# Altium PCB RelayDetect.PcbDoc (part 2 of 2)
Units mm, origin at the board's own origin, x right, y up, seen from the top; angles counter-clockwise.
Board outline 83 x 53 mm, 4 copper layers (Top Layer, Signal, GND, Bottom Layer), stack 0.603 mm thick; 164 components, 110 nets, 604 pads, 228 vias.
Unrouted connection lines stored in the file: 62.
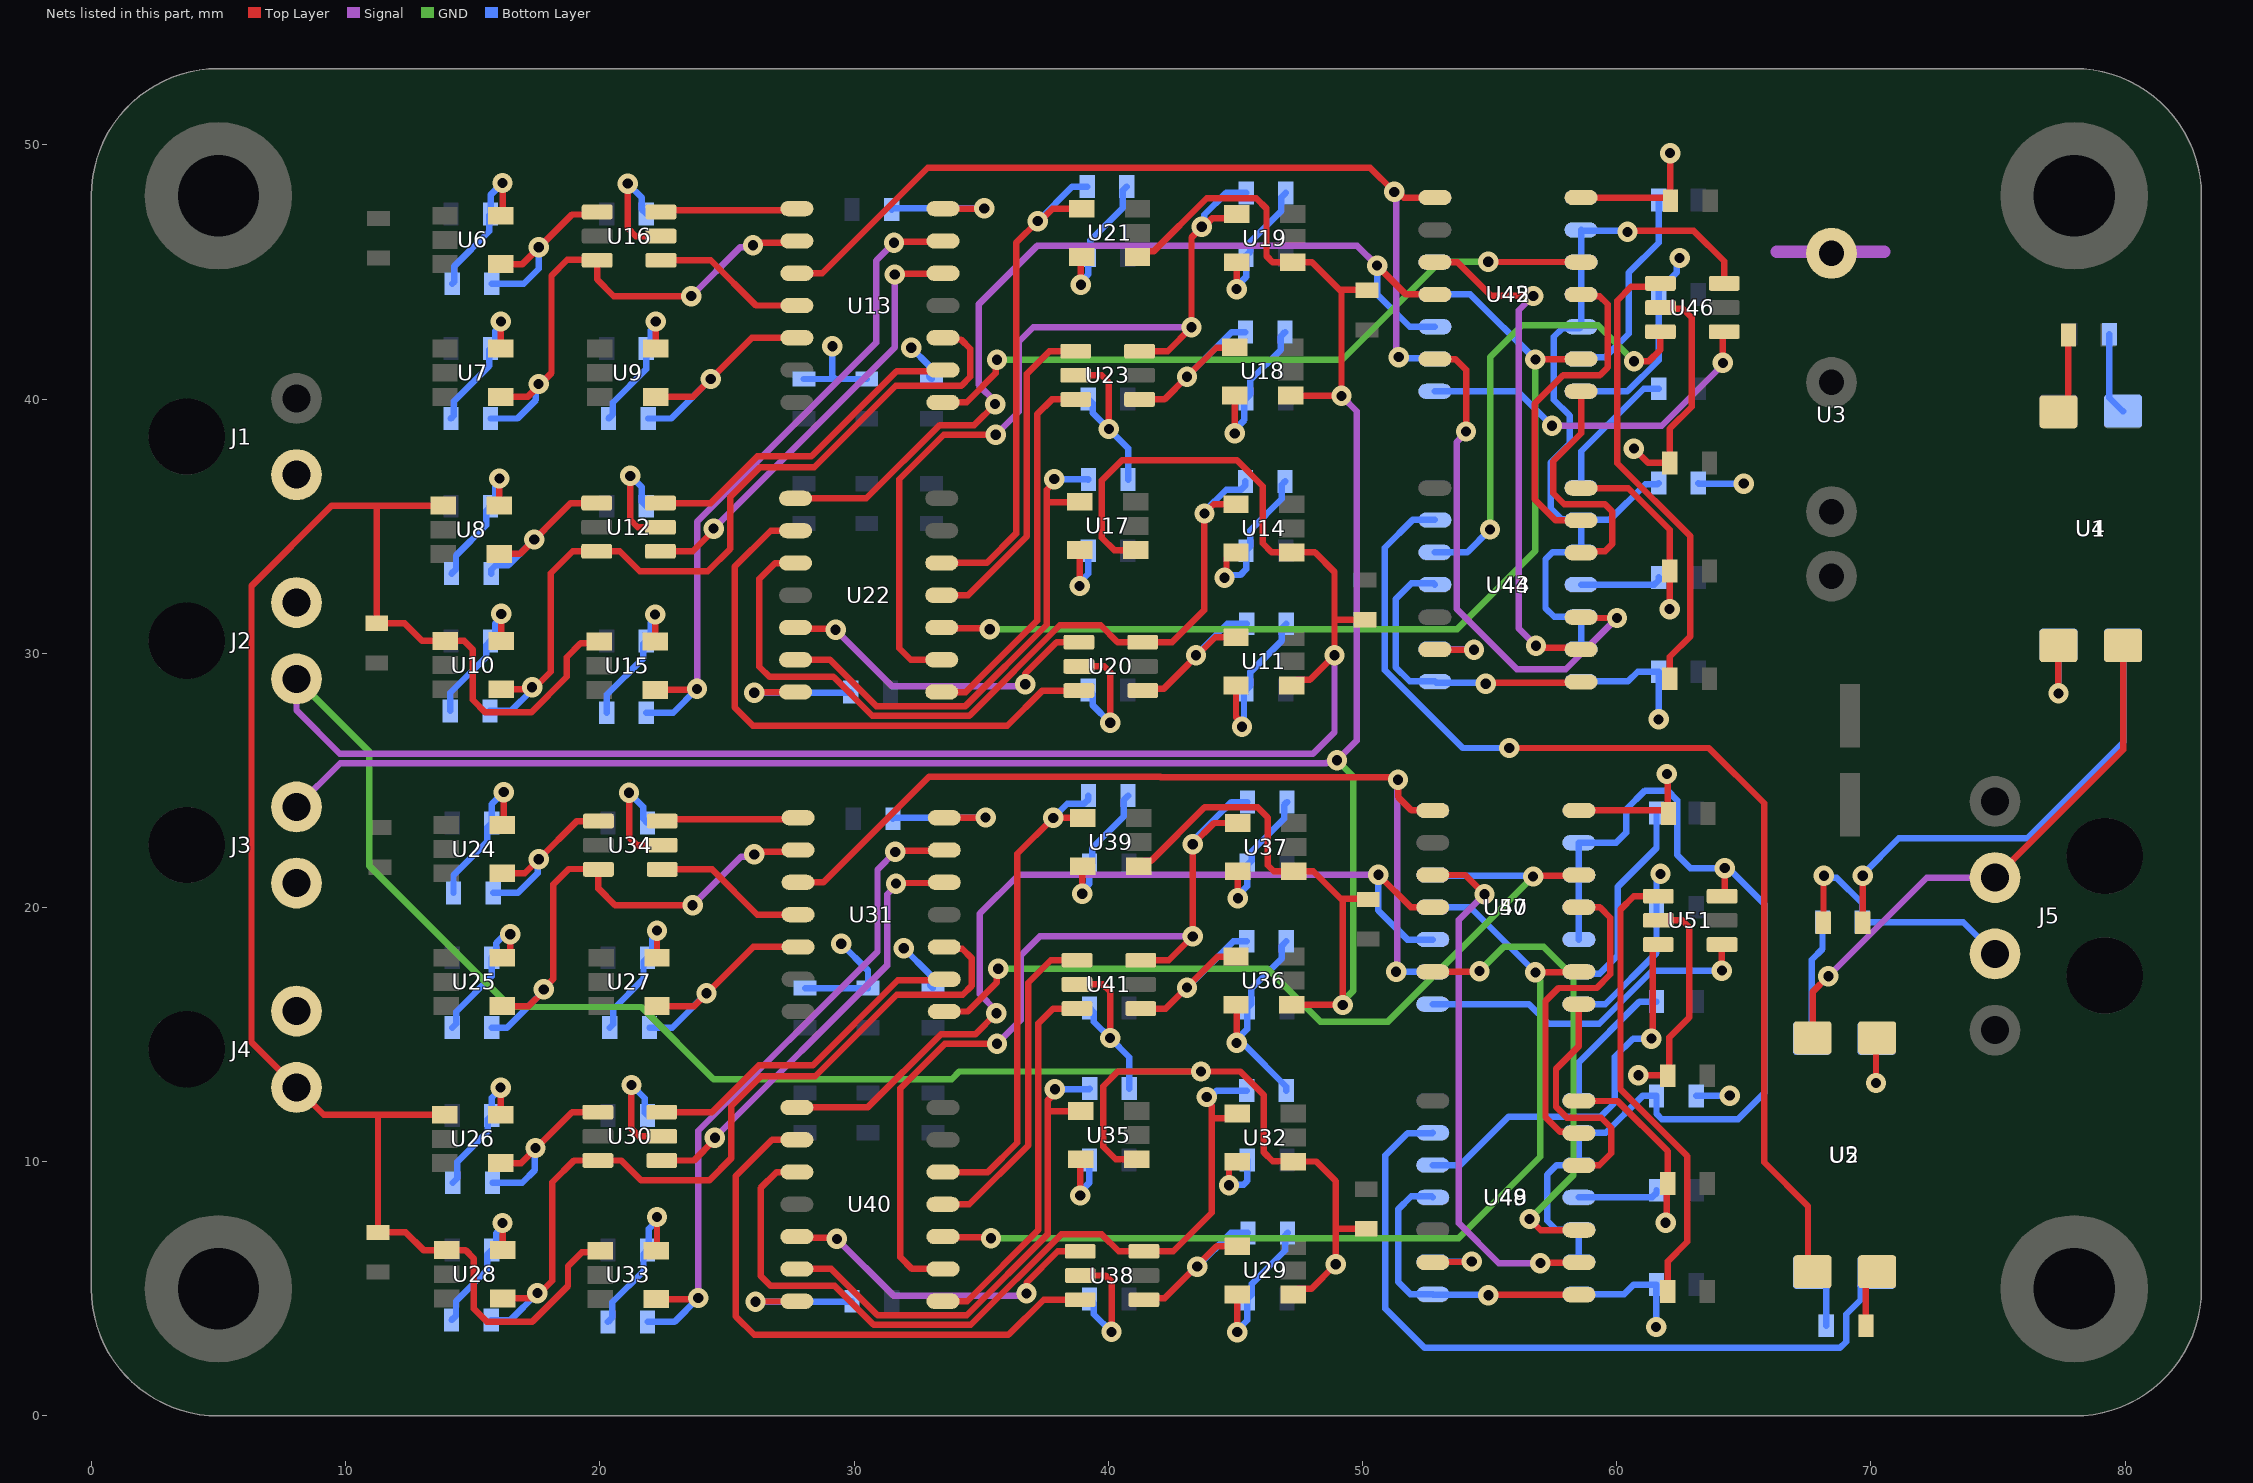
[diagram p4: the nets of this part, all layers, seen from the top]

## Via types
v1: diameter 0.8, hole 0.4, Top Layer to Bottom Layer, tented both sides, 228 vias

## Nets (pads, with @x,y where several pads share a name; then routed paths per layer and width w, separated by ;. In a path a pad name is that pad's centre, name@x,y a point inside that pad or via, vN(x,y) a via of type N, cw(c..) or ccw(c..) an arc to the next point about the centre after c; other vN are vias at no path point) (continued)
In2: J2.2 R15.2 R25.2 U11.1 U14.1 U17.1 U29.1 U32.1 U35.1 | length 137.1
  Top Layer w0.254: U17.1@41.075,34.06 40.24,34.06 39.75,34.55 39.75,36.8 40.55,37.6 45.05,37.6 46.075,36.575 46.075,34.325 46.425,33.975 47.21,33.975 U14.1@47.225,33.96 47.235,33.97 48.13,33.97 48.9,33.2 48.9,31.3 ; U35.1@41.125,10.1 40.29,10.1 39.8,10.59 39.8,12.975 40.375,13.55 45.19,13.55 46.125,12.615 46.125,10.365 46.475,10.015 47.26,10.015 U32.1@47.275,10 47.285,10.01 48.18,10.01 48.95,9.24 48.95,7.34 ; U11.1@47.225,28.735 47.448,28.958 47.933,28.958 v1(48.9,29.925) 48.9,31.3 ; U29.1@47.275,4.775 47.498,4.998 47.983,4.998 v1(48.95,5.965) 48.95,7.34 ; R15.2@50.1,31.32 48.92,31.32 48.9,31.3 ; R25.2@50.15,7.36 48.97,7.36 48.95,7.34
  Signal w0.254: J2.2@8.07,28.992 8.07,27.755 9.771,26.054 48.054,26.054 48.9,26.9 v1(48.9,29.925)
  GND w0.254: J2.2@8.07,28.992 10.925,26.137 10.925,21.65 16.488,16.087 21.638,16.087 24.475,13.25 33.839,13.25 34.139,13.55 v1(43.65,13.55)
In3: J3.2 R16.2 R26.2 U18.1 U19.1 U21.1 U36.1 U37.1 U39.1 | length 104.2
  Top Layer w0.254: U21.1@41.15,45.585 41.373,45.808 41.783,45.808 43.875,47.9 45.825,47.9 46.225,47.5 46.225,45.625 46.465,45.385 U19.1@47.25,45.385 48.015,45.385 49.175,44.225 v1(49.175,40.125) 49.17,40.13 47.18,40.13 U18.1@47.175,40.135 ; U39.1@41.2,21.625 41.423,21.848 41.698,21.848 43.79,23.94 45.875,23.94 46.275,23.54 46.275,21.665 46.515,21.425 U37.1@47.3,21.425 48.065,21.425 49.225,20.265 v1(49.225,16.165) 49.22,16.17 47.23,16.17 U36.1@47.225,16.175 ; 49.102,44.298 R16.2@50.157,44.298 ; 49.152,20.338 R26.2@50.207,20.338
  Signal w0.254: J3.2@8.07,23.958 9.787,25.675 48.578,25.675 48.591,25.688 48.896,25.688 v1(49,25.792) 49.775,26.567 49.775,39.525 v1(49.175,40.125)
  GND w0.254: v1(49,25.792) 49.629,25.163 49.629,16.717 49.225,16.313 v1(49.225,16.165)
In4: J4.2 R14.2 R24.2 U8.1 U10.1 U15.1 U26.1 U28.1 U33.1 | length 70.9
  Top Layer w0.254: U8.1@13.85,35.81 11.143,35.81 ; U26.1@13.9,11.85 11.192,11.85 ; U15.1@19.975,30.46 19.908,30.393 19.243,30.393 18.7,29.85 18.7,29.075 17.3,27.675 15.5,27.675 15,28.175 15,30.15 14.665,30.485 U10.1@13.925,30.485 13.015,30.485 12.32,31.18 R14.2@11.225,31.18 11.225,35.728 11.143,35.81 ; U33.1@20.025,6.5 19.958,6.433 19.293,6.433 18.75,5.89 18.75,5.115 17.35,3.715 15.55,3.715 15.05,4.215 15.05,6.19 14.715,6.525 U28.1@13.975,6.525 13.065,6.525 12.37,7.22 R24.2@11.275,7.22 11.275,11.768 11.192,11.85 ; 11.143,35.81 9.46,35.81 6.3,32.65 6.3,14.695 8.07,12.925 9.145,11.85 11.192,11.85
NetR1_2: R1.2 U1.2 | length 3.2
  Top Layer w0.254: U1.2@77.38,39.5 77.77,39.89 R1.2@77.77,42.525
NetR2_2: R2.2 U2.2 | length 2.3
  Top Layer w0.254: R2.2@69.805,3.55 69.805,5.235 U2.2@70.245,5.675
NetR3_2: R3.2 U4.3 | length 18.1
  Top Layer w0.254: v1(69.675,21.25) 69.677,21.248 69.677,19.402 R3.2@69.68,19.4
  Bottom Layer w0.254: v1(69.675,21.25) 69.675,21.3 71.1,22.725 76.15,22.725 79.92,26.495 U4.3@79.92,30.325
NetR4_2: R4.2 U5.3 | length 4.8
  Bottom Layer w0.254: U5.3@67.68,14.85 67.68,16.468 67.673,16.475 67.673,17.948 68.095,18.37 R4.2@68.095,19.425
NetR5_2: R5.2 U4.2 | length 3.3
  Bottom Layer w0.254: R5.2@79.38,42.55 79.38,40.048 79.903,39.525 U4.2@79.92,39.525
NetR6_2: R6.2 U5.2 | length 2.4
  Bottom Layer w0.254: U5.2@67.68,5.65 67.722,5.65 68.245,5.127 R6.2@68.245,3.55
NetR27_1: R27.1 U43.9 U43.10 U43.12 U43.13 U45.9 U45.10 U45.11 U45.12 U46.3 | length 32
  Top Layer w0.254: v1(60.425,46.575) 60.475,46.625 63.025,46.625 64.23,45.42 U46.3@64.23,44.55
  Bottom Layer w0.254: U43.13@58.6,30.165 U43.12@58.6,31.435 57.54,31.435 57.2,31.775 57.2,33.7 57.475,33.975 U43.10@58.6,33.975 U43.9@58.6,35.245 ; v1(60.425,46.575) 60.385,46.615 58.64,46.615 U45.9@58.6,46.655 U45.10@58.6,45.385 U45.11@58.6,44.115 U45.12@58.6,42.845 58.534,42.779 57.854,42.779 57.525,42.45 57.525,39.975 58.15,39.35 58.15,38.25 57.4,37.5 57.4,35.7 57.825,35.275 58.57,35.275 U43.9@58.6,35.245 ; R27.1@61.65,36.695 61.598,36.643 61.118,36.643 59.72,35.245 U43.9@58.6,35.245
NetR28_2: R28.2 U43.8 | length 5.5
  Bottom Layer w0.254: U43.8@58.6,36.515 58.6,37.946 61.059,40.405 R28.2@61.65,40.405
NetR29_2: R29.2 U43.11 | length 3.2
  Bottom Layer w0.254: U43.11@58.6,32.705 61.477,32.705 61.65,32.878 R29.2@61.65,32.985
NetR30_2: R30.2 U45.13 | length 8
  Bottom Layer w0.254: U45.13@58.6,41.575 58.666,41.641 59.541,41.641 60.475,42.575 60.475,44.975 61.65,46.15 R30.2@61.65,47.825
NetR31_2: R31.2 U46.4 | length 18.4
  Top Layer w0.254: U46.4@61.72,44.55 61.595,44.425 60.575,44.425 60.023,43.873 60.023,37.477 62.9,34.6 62.9,30.675 62.09,29.865 R31.2@62.09,29
NetR32_1: R32.1 U48.9 U48.10 U48.12 U48.13 U50.9 U50.10 U50.11 U50.12 U51.3 | length 40.4
  Top Layer w0.254: U51.3@64.145,20.445 64.25,20.55 v1(64.25,21.55)
  Bottom Layer w0.254: U48.13@58.515,6.06 U48.12@58.515,7.33 57.62,7.33 57.27,7.68 57.27,9.495 57.645,9.87 U48.10@58.515,9.87 U48.9@58.515,11.14 59.565,11.14 61.015,12.59 R32.1@61.565,12.59 61.565,11.885 61.775,11.675 64.775,11.675 65.796,12.696 65.796,20.152 64.398,21.55 62.9,21.55 62.375,22.075 62.375,24.225 62,24.6 61.114,24.6 60.375,23.861 60.375,22.95 59.975,22.55 U50.9@58.515,22.55 U50.10@58.515,21.28 U50.11@58.515,20.01 U50.12@58.515,18.74
NetR33_2: R33.2 U48.8 | length 5.5
  Bottom Layer w0.254: U48.8@58.515,12.41 58.515,13.915 60.9,16.3 R33.2@61.565,16.3
NetR34_2: R34.2 U48.11 | length 3.2
  Bottom Layer w0.254: U48.11@58.515,8.6 61.392,8.6 61.565,8.773 R34.2@61.565,8.88
NetR35_2: R35.2 U50.13 | length 8.1
  Bottom Layer w0.254: U50.13@58.515,17.47 58.581,17.404 59.321,17.404 59.325,17.4 60.05,18.125 60.05,20.825 61.565,22.34 R35.2@61.565,23.72
NetR36_2: R36.2 U51.4 | length 18.1
  Top Layer w0.254: U51.4@61.635,20.445 60.67,20.445 60.15,19.925 60.15,12.85 62.775,10.225 62.775,6.85 62.005,6.08 R36.2@62.005,4.895
NetR37_1: R37.1 U6.4 U16.1 | length 7.6
  Top Layer w0.254: U6.4@16.11,45.31 16.96,45.31 18.911,47.261 19.796,47.261 U16.1@19.895,47.36
  Bottom Layer w0.254: R37.1@15.755,44.535 17.01,44.535 17.6,45.125 v1(17.6,45.975)
NetR38_1: R38.1 U7.4 U13.2 U16.3 | length 20.8
  Top Layer w0.254: U7.4@16.11,40.085 17.16,40.085 18.1,41.025 18.1,44.85 18.725,45.475 19.88,45.475 U16.3@19.895,45.46 19.895,44.705 20.55,44.05 v1(23.6,44.05) ; v1(26.025,46.05) 26.129,46.154 27.684,46.154 U13.2@27.75,46.22
  Signal w0.254: v1(23.6,44.05) 25.514,45.964 25.939,45.964 v1(26.025,46.05)
  Bottom Layer w0.254: R38.1@15.705,39.235 16.76,39.235 17.489,39.964 17.489,40.487 v1(17.594,40.591)
NetR39_1: R39.1 U8.4 U12.1 | length 7
  Top Layer w0.254: U8.4@16.05,33.91 16.86,33.91 18.86,35.91 U12.1@19.875,35.91
  Bottom Layer w0.254: R39.1@15.73,33.135 15.73,33.285 15.903,33.458 16.408,33.458 v1(17.425,34.475)
NetR40_1: R40.1 U9.4 U13.5 | length 9.6
  Top Layer w0.254: U9.4@22.2,40.085 23.66,40.085 25.985,42.41 U13.5@27.75,42.41
  Bottom Layer w0.254: R40.1@21.905,39.235 22.81,39.235 v1(24.367,40.792)
NetR41_1: R41.1 U10.4 U12.3 U13.10 | length 32
  Top Layer w0.254: U10.4@16.125,28.585 v1@17.34,28.585 ; v1@17.403,28.603 18.075,29.275 18.075,33.15 18.935,34.01 20.79,34.01 21.575,33.225 24.25,33.225 25.129,34.104 25.129,35.896 25.125,35.9 25.125,36.139 26.305,37.32 28.43,37.32 31.636,40.525 34.225,40.525 34.575,40.875 34.575,41.975 34.206,42.344 33.566,42.344 U13.10@33.5,42.41
  Bottom Layer w0.254: R41.1@15.68,27.735 16.51,27.735 17.34,28.565 v1(17.34,28.667)
NetR42_1: R42.1 U11.4 U20.1 | length 7
  Top Layer w0.254: U20.1@41.355,28.535 41.419,28.599 42.174,28.599 44.21,30.635 U11.4@45.025,30.635
  Bottom Layer w0.254: v1(43.45,29.925) 44.685,31.16 R42.1@45.445,31.16
NetR43_1: R43.1 U14.4 U20.3 U22.10 | length 33.2
  Top Layer w0.254: U22.10@27.7,33.555 27.695,33.55 26.9,33.55 26.275,32.925 26.275,29.475 26.675,29.075 29.189,29.075 30.72,27.544 34.541,27.544 38.097,31.1 39.7,31.1 40.365,30.435 42.51,30.435 43.775,31.7 v1@43.775,35.502 ; v1(43.786,35.502) 44.144,35.86 U14.4@45.025,35.86
  Bottom Layer w0.254: v1(43.786,35.502) 43.786,35.586 44.637,36.437 45.222,36.437 45.395,36.61 R43.1@45.395,36.76
NetR44_1: R44.1 U13.13 U15.4 | length 26.8
  Top Layer w0.254: U15.4@22.175,28.56 23.785,28.56 v1(23.825,28.6) ; v1(31.575,46.15) 31.61,46.185 33.465,46.185 U13.13@33.5,46.22
  Signal w0.254: v1(23.825,28.6) 23.825,35.175 30.873,42.223 30.873,45.448 v1(31.575,46.15)
  Bottom Layer w0.254: R44.1@21.83,27.66 22.885,27.66 v1(23.825,28.6)
NetR45_1: R45.1 U17.4 U22.13 | length 20.4
  Top Layer w0.254: U22.13@27.7,29.745 29.055,29.745 30.877,27.923 34.384,27.923 37.579,31.118 37.579,36.428 37.875,36.724 v1(37.875,36.85) ; 37.6,35.943 38.858,35.943 U17.4@38.875,35.96
  Bottom Layer w0.254: v1(37.875,36.85) 39.205,36.85 R45.1@39.22,36.835
NetR46_1: R46.1 U18.4 U23.1 | length 7.6
  Top Layer w0.254: U23.1@41.23,39.985 42.21,39.985 v1(43.1,40.875) 44.243,42.018 44.958,42.018 U18.4@44.975,42.035
  Bottom Layer w0.254: v1(43.1,40.875) 44.86,42.635 R46.1@45.395,42.635
NetR47_1: R47.1 U19.4 U22.2 U23.3 | length 34.8
  Top Layer w0.254: U22.2@33.45,29.745 32.23,29.745 31.775,30.2 31.775,36.85 33.525,38.6 v1(35.575,38.6) ; U23.3@41.23,41.885 42.335,41.885 v1(43.275,42.825) 43.275,46.353 43.675,46.753 v1(43.675,46.775) 43.751,46.775 44.097,47.121 44.886,47.121 U19.4@45.05,47.285
  Signal w0.254: v1(35.575,38.6) 36.475,39.499 36.475,42.25 37.05,42.825 v1(43.275,42.825)
  Bottom Layer w0.254: v1(43.675,46.775) 43.779,46.879 43.779,47.254 44.635,48.11 R47.1@45.425,48.11
NetR48_1: R48.1 U21.4 U22.5 | length 20.5
  Top Layer w0.254: U22.5@33.45,33.555 35.219,33.555 36.375,34.711 36.375,46.15 v1(37.225,47) 37.321,47 37.806,47.485 U21.4@38.95,47.485
  Bottom Layer w0.254: v1(37.225,47) 38.585,48.36 R48.1@39.17,48.36
NetR49_1: R49.1 U24.4 U34.1 | length 7.3
  Top Layer w0.254: U24.4@16.16,21.35 17.046,21.35 17.596,21.9 v1(17.6,21.9) 19.1,23.4 U34.1@19.945,23.4
  Bottom Layer w0.254: R49.1@15.805,20.575 16.775,20.575 17.552,21.352 17.552,21.852 v1(17.6,21.9)
NetR50_1: R50.1 U25.4 U31.2 U34.3 | length 20.7
  Top Layer w0.254: U25.4@16.16,16.125 17.21,16.125 17.794,16.709 17.794,16.822 18.175,17.203 18.175,20.915 18.775,21.515 19.93,21.515 U34.3@19.945,21.5 19.945,20.745 20.6,20.09 v1(23.65,20.09) ; v1(26.075,22.09) 26.179,22.194 27.734,22.194 U31.2@27.8,22.26
  Signal w0.254: v1(23.65,20.09) 25.564,22.004 25.989,22.004 v1(26.075,22.09)
  Bottom Layer w0.254: R50.1@15.755,15.275 16.35,15.275 17.794,16.719 v1(17.794,16.781)
NetR51_1: R51.1 U26.4 U30.1 | length 7.4
  Top Layer w0.254: U26.4@16.1,9.95 16.91,9.95 18.91,11.95 U30.1@19.925,11.95
  Bottom Layer w0.254: R51.1@15.78,9.175 16.95,9.175 17.45,9.675 17.45,10.519 v1(17.471,10.54)
NetR52_1: R52.1 U27.4 U31.5 | length 9.3
  Top Layer w0.254: U27.4@22.25,16.125 23.71,16.125 26.035,18.45 U31.5@27.8,18.45
  Bottom Layer w0.254: R52.1@21.955,15.275 22.85,15.275 v1(24.2,16.625)
NetR53_1: R53.1 U28.4 U30.3 U31.10 | length 32
  Top Layer w0.254: U28.4@16.175,4.625 v1@17.435,4.625 ; v1@17.592,4.783 18.125,5.315 18.125,9.19 18.985,10.05 20.84,10.05 21.625,9.265 24.3,9.265 25.179,10.144 25.179,11.936 25.175,11.94 25.175,12.179 26.355,13.36 28.48,13.36 31.686,16.565 34.275,16.565 34.625,16.915 34.625,18.015 34.256,18.384 33.616,18.384 U31.10@33.55,18.45
  Bottom Layer w0.254: R53.1@15.73,3.775 16.488,3.775 v1(17.544,4.831)
NetR54_1: R54.1 U29.4 U38.1 | length 7.1
  Top Layer w0.254: U38.1@41.405,4.575 41.469,4.639 42.224,4.639 44.26,6.675 U29.4@45.075,6.675
  Bottom Layer w0.254: v1(43.5,5.875) 44.825,7.2 R54.1@45.495,7.2
NetR55_1: R55.1 U32.4 U38.3 U40.10 | length 33.5
  Top Layer w0.254: U40.10@27.75,9.595 27.745,9.59 26.95,9.59 26.325,8.965 26.325,5.515 26.725,5.115 29.239,5.115 30.77,3.584 34.591,3.584 38.147,7.14 39.75,7.14 40.415,6.475 U38.3@41.405,6.475 42.56,6.475 44.075,7.99 44.075,11.706 ; v1(43.875,12.55) 43.875,12.402 44.075,12.202 44.075,11.706 ; U32.4@45.075,11.9 44.881,11.706 44.075,11.706
  Bottom Layer w0.254: v1(43.875,12.55) 44.023,12.55 44.273,12.8 R55.1@45.445,12.8
NetR56_1: R56.1 U31.13 U33.4 | length 26.8
  Top Layer w0.254: U33.4@22.225,4.6 23.835,4.6 v1(23.875,4.64) ; v1(31.625,22.19) 31.66,22.225 33.515,22.225 U31.13@33.55,22.26
  Signal w0.254: v1(23.875,4.64) 23.875,11.215 30.923,18.263 30.923,21.488 v1(31.625,22.19)
  Bottom Layer w0.254: R56.1@21.88,3.7 22.935,3.7 v1(23.875,4.64)
NetR57_1: R57.1 U35.4 U40.13 | length 20.4
  Top Layer w0.254: U40.13@27.75,5.785 29.105,5.785 30.927,3.963 34.434,3.963 37.629,7.158 37.629,11.983 ; v1(37.902,12.85) 37.902,12.702 37.629,12.429 37.629,11.983 ; U35.4@38.925,12 38.908,11.983 37.629,11.983
  Bottom Layer w0.254: v1(37.902,12.85) 39.245,12.85 R57.1@39.27,12.875
NetR58_1: R58.1 U36.4 U41.1 | length 7.7
  Top Layer w0.254: U41.1@41.28,16.025 42.26,16.025 44.293,18.058 45.008,18.058 U36.4@45.025,18.075
  Bottom Layer w0.254: v1(43.1,16.85) 44.925,18.675 R58.1@45.445,18.675
NetR59_1: R59.1 U37.4 U40.2 U41.3 | length 35.1
  Top Layer w0.254: U40.2@33.5,5.785 32.28,5.785 31.825,6.24 31.825,12.89 33.574,14.64 v1(35.625,14.64) ; U41.3@41.28,17.925 42.385,17.925 v1(43.325,18.865) v1(43.325,22.49) 44.16,23.325 U37.4@45.1,23.325
  Signal w0.254: v1(35.625,14.64) 36.55,15.565 36.55,18.103 37.312,18.865 v1(43.325,18.865)
  Bottom Layer w0.254: v1(43.325,22.49) 43.325,22.625 44.25,23.55 44.85,24.15 R59.1@45.475,24.15
NetR60_1: R60.1 U39.4 U40.5 | length 19.8
  Top Layer w0.254: U40.5@33.5,9.595 35.269,9.595 36.425,10.751 36.425,22.115 v1(37.835,23.525) U39.4@39,23.525
  Bottom Layer w0.254: v1(37.835,23.525) 38.387,24.077 39.047,24.077 39.22,24.25 R60.1@39.22,24.4
NetU1_3: U1.3 U4.4 | length 3.8
  Top Layer w0.254: v1(77.375,28.425) 77.375,30.295 U1.3@77.38,30.3
  Bottom Layer w0.254: v1(77.375,28.425) 77.375,30.32 U4.4@77.38,30.325
NetU2_3: U2.3 U5.4 | length 3.6
  Top Layer w0.254: v1(70.2,13.1) 70.2,14.83 U2.3@70.245,14.875
  Bottom Layer w0.254: v1(70.2,13.1) 70.2,14.83 U5.4@70.22,14.85
NetU12_4: U12.4 U13.12 | length 17.4
  Top Layer w0.254: U12.4@22.385,34.01 23.652,34.01 24.477,34.835 v1(24.477,34.905) ; v1(31.6,44.9) 31.625,44.925 33.475,44.925 U13.12@33.5,44.95
  Signal w0.254: v1(24.477,34.905) 31.6,42.028 v1(31.6,44.9)
NetU12_6: U12.6 U13.9 | length 13.3
  Top Layer w0.254: U12.6@22.385,35.91 24.36,35.91 26.2,37.75 28.325,37.75 31.675,41.1 33.46,41.1 U13.9@33.5,41.14
NetU13_1: U13.1 U16.6 | length 5.4
  Top Layer w0.254: U16.6@22.405,47.36 22.47,47.425 27.685,47.425 U13.1@27.75,47.49
NetU13_4: U13.4 U16.4 | length 6.1
  Top Layer w0.254: U16.4@22.405,45.46 24.365,45.46 26.145,43.68 U13.4@27.75,43.68
NetU20_4: U20.4 U22.12 | length 13.1
  Top Layer w0.254: U22.12@27.7,31.015 27.745,30.97 29.23,30.97 v1(29.275,30.925) ; v1(36.737,28.784) 36.737,29.204 37.968,30.435 U20.4@38.845,30.435
  Signal w0.254: v1(29.275,30.925) 31.505,28.695 36.648,28.695 v1(36.737,28.784)
NetU20_6: U20.6 U22.9 | length 22.9
  Top Layer w0.254: U22.9@27.7,34.825 26.725,34.825 25.3,33.4 25.3,27.875 26.025,27.15 36.025,27.15 37.41,28.535 U20.6@38.845,28.535
NetU22_1: U22.1 U23.6 | length 14.8
  Top Layer w0.254: U22.1@33.45,28.475 34.4,28.475 37.2,31.275 37.2,39.4 37.785,39.985 U23.6@38.72,39.985
NetU22_4: U22.4 U23.4 | length 13
  Top Layer w0.254: U22.4@33.45,32.285 34.485,32.285 36.8,34.6 36.8,41 37.685,41.885 U23.4@38.72,41.885
NetU30_4: U30.4 U31.12 | length 17.4
  Top Layer w0.254: U30.4@22.435,10.05 23.702,10.05 24.527,10.875 v1(24.527,10.945) ; v1(31.65,20.94) 31.675,20.965 33.525,20.965 U31.12@33.55,20.99
  Signal w0.254: v1(24.527,10.945) 31.3,17.718 31.3,18.104 31.302,18.106 31.302,20.518 31.65,20.866 v1(31.65,20.94)
NetU30_6: U30.6 U31.9 | length 13.3
  Top Layer w0.254: U30.6@22.435,11.95 24.41,11.95 26.25,13.79 28.375,13.79 31.725,17.14 33.51,17.14 U31.9@33.55,17.18
NetU31_1: U31.1 U34.6 | length 5.4
  Top Layer w0.254: U34.6@22.455,23.4 22.52,23.465 27.735,23.465 U31.1@27.8,23.53
NetU31_4: U31.4 U34.4 | length 6.1
  Top Layer w0.254: U34.4@22.455,21.5 24.415,21.5 26.195,19.72 U31.4@27.8,19.72
NetU38_4: U38.4 U40.12 | length 13.1
  Top Layer w0.254: U40.12@27.75,7.055 27.795,7.01 29.28,7.01 v1(29.325,6.965) ; v1(36.786,4.824) 36.786,5.244 38.018,6.475 U38.4@38.895,6.475
  Signal w0.254: v1(29.325,6.965) 31.555,4.735 36.698,4.735 v1(36.786,4.824)
NetU38_6: U38.6 U40.9 | length 22.9
  Top Layer w0.254: U40.9@27.75,10.865 26.775,10.865 25.35,9.44 25.35,3.915 26.075,3.19 36.075,3.19 37.46,4.575 U38.6@38.895,4.575
NetU40_1: U40.1 U41.6 | length 14.8
  Top Layer w0.254: U40.1@33.5,4.515 34.45,4.515 37.25,7.315 37.25,15.44 37.835,16.025 U41.6@38.77,16.025
NetU40_4: U40.4 U41.4 | length 13
  Top Layer w0.254: U40.4@33.5,8.325 34.535,8.325 36.85,10.64 36.85,17.04 37.735,17.925 U41.4@38.77,17.925
NetU42_3: U42.3 U44.9 | length 20.5
  Top Layer w0.254: U42.3@52.85,45.385 53.74,45.385 55.068,44.057 v1(56.716,44.057) ; v1(56.825,30.3) 56.914,30.211 58.534,30.211 U44.9@58.6,30.145
  Signal w0.254: v1(56.716,44.057) 56.15,43.492 56.15,30.975 v1(56.825,30.3)
NetU42_6: U42.6 U44.10 | length 20.5
  Top Layer w0.254: U42.6@52.85,41.575 52.853,41.572 53.653,41.572 54.075,41.15 v1(54.075,38.725) ; U44.10@58.6,31.415 58.627,31.388 v1(60.014,31.388)
  Signal w0.254: v1(54.075,38.725) 54.075,38.678 53.7,38.303 53.7,31.75 56.075,29.375 58.001,29.375 v1(60.014,31.388)
NetU42_8: U42.8 U44.12 | length 9.7
  Top Layer w0.254: U44.12@58.6,33.955 58.666,34.021 59.546,34.021 59.825,34.3 59.825,35.575 59.54,35.86 57.94,35.86 57.504,36.296 57.504,37.561 58.6,38.657 U42.8@58.6,40.305
NetU42_11: U42.11 U44.13 | length 13.1
  Top Layer w0.254: U44.13@58.6,35.225 57.6,35.225 56.775,36.05 56.775,39.825 57.89,40.94 59.34,40.94 59.644,41.244 59.644,43.731 59.326,44.049 58.666,44.049 U42.11@58.6,44.115
NetU43_1: U43.1 U43.4 U44.8 | length 12.1
  Top Layer w0.254: v1(54.85,28.8) 54.887,28.837 58.562,28.837 U44.8@58.6,28.875
  Bottom Layer w0.254: U43.4@52.85,32.705 52.805,32.75 51.925,32.75 51.3,32.125 51.3,29.45 51.855,28.895 U43.1@52.85,28.895 52.897,28.847 54.803,28.847 v1(54.85,28.8)
NetU43_2: U43.2 U44.6 | length 3.1
  Top Layer w0.254: U44.6@52.85,30.145 54.383,30.145 v1(54.389,30.139)
  Bottom Layer w0.254: U43.2@52.85,30.165 54.363,30.165 v1(54.389,30.139)
NetU43_5: U43.5 U46.6 | length 18
  Top Layer w0.254: v1(60.681,41.485) 60.689,41.494 61.269,41.494 61.72,41.945 U46.6@61.72,42.65
  GND w0.254: v1(55.019,34.867) 55.019,41.644 56.275,42.9 59.266,42.9 v1(60.681,41.485)
  Bottom Layer w0.254: U43.5@52.85,33.975 54.127,33.975 v1(55.019,34.867)
NetU45_1: U45.1 U46.1 | length 14.2
  Top Layer w0.254: v1(64.175,41.425) 64.175,42.595 U46.1@64.23,42.65
  Signal w0.254: v1(57.454,38.95) 61.775,38.95 64.175,41.35 v1(64.175,41.425)
  Bottom Layer w0.254: U45.1@52.85,40.305 56.099,40.305 v1(57.454,38.95)
NetU47_3: U47.3 U49.9 | length 21.1
  Top Layer w0.254: U47.3@52.765,21.28 54.045,21.28 v1(54.8,20.525) ; v1(56.999,6.012) 57.013,6.026 58.501,6.026 U49.9@58.515,6.04
  Signal w0.254: v1(54.8,20.525) 53.788,19.513 53.788,7.587 55.363,6.012 v1(56.999,6.012)
NetU47_6: U47.6 U49.10 | length 18.8
  Top Layer w0.254: U47.6@52.765,17.47 54.57,17.47 v1(54.6,17.5) ; v1(56.575,7.75) 57.015,7.31 U49.10@58.515,7.31
  GND w0.254: v1(54.6,17.5) 55.55,18.45 57.125,18.45 58.3,17.275 58.3,9.475 v1(56.575,7.75)
NetU47_8: U47.8 U49.12 | length 9.4
  Top Layer w0.254: U49.12@58.515,9.85 58.525,9.86 59.31,9.86 59.79,10.34 59.79,11.335 59.394,11.731 58.044,11.731 57.613,12.161 57.613,13.65 58.515,14.552 U47.8@58.515,16.2
NetU47_11: U47.11 U49.13 | length 12.8
  Top Layer w0.254: U49.13@58.515,11.12 58.455,11.18 57.77,11.18 57.2,11.75 57.2,16.325 57.71,16.835 59.21,16.835 59.75,17.375 59.75,19.6 59.34,20.01 U47.11@58.515,20.01
NetU48_1: U48.1 U48.4 U49.8 | length 11.8
  Top Layer w0.254: v1(54.952,4.749) 54.973,4.77 U49.8@58.515,4.77
  Bottom Layer w0.254: U48.4@52.765,8.6 52.723,8.642 51.917,8.642 51.4,8.125 51.4,5.275 51.885,4.79 U48.1@52.765,4.79 52.786,4.769 54.931,4.769 v1(54.952,4.749)
NetU48_2: U48.2 U49.6 | length 3.1
  Top Layer w0.254: U49.6@52.765,6.04 52.783,6.058 54.283,6.058 v1(54.3,6.075)
  Bottom Layer w0.254: U48.2@52.765,6.06 52.773,6.068 54.293,6.068 v1(54.3,6.075)
NetU48_5: U48.5 U51.6 | length 15.6
  Top Layer w0.254: v1(61.365,14.842) 61.423,14.9 61.423,18.382 61.586,18.545 U51.6@61.635,18.545
  Bottom Layer w0.254: U48.5@52.765,9.87 53.845,9.87 55.753,11.778 59.378,11.778 59.925,12.325 59.925,14.125 60.642,14.842 v1(61.365,14.842)
NetU50_1: U50.1 U51.1 | length 13.6
  Top Layer w0.254: v1(64.136,17.518) 64.136,18.536 U51.1@64.145,18.545
  Bottom Layer w0.254: U50.1@52.765,16.2 56.55,16.2 57.325,15.425 59.311,15.425 61.404,17.518 v1(64.136,17.518)
Out1: C2.2 C3.2 C4.2 C5.2 C6.2 C7.2 C8.2 C9.2 C10.2 C11.1 C12.2 C13.2 C14.2 C15.2 C16.2 C17.2 C18.2 C19.2 C20.2 C21.2 C22.2 C23.2 C24.2 C25.2 C26.2 C27.2 C28.2 C29.1 C30.2 C31.2 C32.2 C33.2 C34.2 C35.2 C36.2 C37.2 C38.2 C39.2 C40.2 C41.2 C42.2 C43.2 C44.2 C45.2 C46.2 C47.2 J1.1 J2.1 J3.1 J4.1 R7.2 R8.2 R9.2 R17.2 R18.2 R19.2 R27.2 R32.2 R37.2 R38.2 R39.2 R40.2 R41.2 R42.2 R43.2 R44.2 R45.2 R46.2 R47.2 R48.2 R49.2 R50.2 R51.2 R52.2 R53.2 R54.2 R55.2 R56.2 R57.2 R58.2 R59.2 R60.2 U3.6 U6.5 U7.5 U8.5 U9.5 U10.5 U11.5 U12.5 U13.14 U14.5 U15.5 U16.5 U17.5 U18.5 U19.5 U20.5 U21.5 U22.14 U23.5 U24.5 U25.5 U26.5 U27.5 U28.5 U29.5 U30.5 U31.14 U32.5 U33.5 U34.5 U35.5 U36.5 U37.5 U38.5 U39.5 U40.14 U41.5 U42.14 U43.14 U44.14 U45.14 U46.5 U47.14 U48.14 U49.14 U50.14 U51.5 | length 286.2
  Top Layer w0.254: U8.5@16.05,35.81 v1(16.05,36.875) ; U26.5@16.1,11.85 v1(16.1,12.915) ; U7.5@16.11,41.985 v1(16.11,43.05) ; U6.5@16.11,47.21 16.175,47.275 v1(16.175,48.5) ; U10.5@16.125,30.485 v1(16.125,31.55) ; U25.5@16.16,18.025 16.252,18.025 16.475,18.248 v1(16.475,18.95) ; U24.5@16.16,23.25 16.225,23.315 v1(16.225,24.54) ; U28.5@16.175,6.525 v1(16.175,7.59) ; v1(21.1,48.475) 21.1,46.725 21.415,46.41 U16.5@22.405,46.41 ; v1(21.15,24.515) 21.15,22.765 21.465,22.45 U34.5@22.455,22.45 ; v1(21.195,36.98) 21.195,35.255 21.49,34.96 U12.5@22.385,34.96 ; v1(21.245,13.02) 21.245,11.295 21.54,11 U30.5@22.435,11 ; U15.5@22.175,30.46 v1(22.175,31.525) ; U9.5@22.2,41.985 v1(22.2,43.05) ; U33.5@22.225,6.5 22.25,6.525 v1(22.25,7.825) ; U27.5@22.25,18.025 v1(22.25,19.09) ; v1(26.075,28.45) 26.087,28.462 27.687,28.462 U22.14@27.7,28.475 ; v1(26.125,4.49) 26.137,4.503 27.737,4.503 U40.14@27.75,4.515 ; U13.14@33.5,47.49 33.505,47.495 35.12,47.495 v1(35.125,47.5) ; U31.14@33.55,23.53 33.555,23.535 35.17,23.535 v1(35.175,23.54) ; U23.5@38.72,40.935 39.74,40.935 40.025,40.65 v1(40.025,38.825) ; U41.5@38.77,16.975 39.79,16.975 40.075,16.69 v1(40.075,14.865) ; U20.5@38.845,29.485 39.84,29.485 40.079,29.246 v1(40.079,27.269) ; v1(38.875,32.65) U17.5@38.875,34.06 ; U38.5@38.895,5.525 39.89,5.525 40.129,5.286 v1(40.129,3.309) ; v1(38.9,8.675) 38.9,10.075 U35.5@38.925,10.1 ; v1(38.925,44.5) 38.925,45.56 U21.5@38.95,45.585 ; v1(38.975,20.54) 38.975,21.6 U39.5@39,21.625 ; v1(44.575,32.975) 44.652,33.052 44.652,33.737 44.875,33.96 U14.5@45.025,33.96 ; v1(44.75,9.075) 44.75,9.777 44.973,10 U32.5@45.075,10 ; v1(44.975,38.65) U18.5@44.975,40.135 ; U36.5@45.025,16.175 45.05,16.15 v1(45.05,14.675) ; U11.5@45.025,28.735 45.025,27.492 45.259,27.258 v1(45.259,27.11) ; v1(45.05,44.325) U19.5@45.05,45.385 ; v1(45.075,3.3) U29.5@45.075,4.775 ; v1(45.1,20.365) U37.5@45.1,21.425 ; U49.14@58.515,12.39 60.035,12.39 62.005,10.42 C46.2@62.005,9.139 61.965,9.099 61.965,7.64 v1(61.925,7.6) ; U47.14@58.515,23.82 C47.2@61.91,23.82 ; U44.14@58.6,36.495 60.455,36.495 62.09,34.86 62.09,31.746 v1(62.083,31.739) ; U42.14@58.6,47.925 C42.2@61.995,47.925 ; v1(60.675,38.05) 61.237,37.488 C38.2@62.09,37.488 62.09,38.84 62.95,39.7 62.95,43.2 62.6,43.55 61.77,43.55 U46.5@61.72,43.6 ; v1(60.853,13.401) 61.987,13.401 C43.2@62.005,13.383 62.075,13.452 62.075,14.9 62.85,15.675 62.85,19.225 62.58,19.495 U51.5@61.635,19.495 ; v1(61.975,25.252) 62.005,25.222 62.005,23.725 C47.2@62.035,23.695 ; v1(62.1,49.675) 62.11,49.665 62.11,47.81 C42.2@62.12,47.8
  Signal w0.5: 66.3,45.8 70.525,45.8
  Bottom Layer w0.254: R41.2@14.12,27.735 14.12,28.445 15.525,29.85 15.525,29.925 15.532,29.932 15.532,30.312 C15.2@15.705,30.485 15.878,30.658 15.878,31.155 16.125,31.402 v1(16.125,31.55) ; R38.2@14.145,39.235 14.255,39.345 14.255,39.905 15.652,41.302 15.652,41.932 C18.2@15.705,41.985 15.878,42.158 15.878,42.67 16.11,42.902 v1(16.11,43.05) ; R53.2@14.17,3.775 14.343,3.948 14.343,4.518 15.575,5.75 15.575,6.05 15.582,6.057 15.582,6.352 15.928,6.698 15.928,7.195 16.175,7.442 v1(16.175,7.59) ; R39.2@14.17,33.135 14.343,33.308 14.343,33.843 15.532,35.032 15.532,35.612 C16.2@15.705,35.785 15.878,35.958 15.878,36.555 16.05,36.727 v1(16.05,36.875) ; R50.2@14.195,15.275 14.35,15.43 14.35,15.9 15.755,17.305 C36.2@15.755,18.025 15.928,18.198 15.928,18.603 16.171,18.846 16.371,18.846 v1(16.475,18.95) ; R37.2@14.195,44.535 14.267,44.607 14.267,45.217 15.653,46.603 15.653,47.233 C19.2@15.705,47.285 15.705,48.03 v1(16.175,48.5) ; R51.2@14.22,9.175 14.393,9.348 14.393,9.993 15.6,11.2 15.6,11.67 C34.2@15.755,11.825 15.755,12.514 16.1,12.859 v1(16.1,12.915) ; R49.2@14.245,20.575 14.245,21.27 15.582,22.607 15.582,23.152 C37.2@15.755,23.325 15.755,24.07 v1(16.225,24.54) ; R44.2@20.27,27.66 20.27,28.37 21.717,29.817 21.717,30.372 C11.1@21.83,30.485 22.003,30.658 22.003,31.205 22.175,31.377 v1(22.175,31.525) ; R56.2@20.32,3.7 20.493,3.873 20.493,4.468 21.719,5.694 21.719,6.364 C29.1@21.88,6.525 21.929,6.574 21.929,7.356 22.25,7.677 v1(22.25,7.825) ; R40.2@20.345,39.235 20.505,39.395 20.505,39.855 21.83,41.18 C13.2@21.83,41.985 22.003,42.158 22.003,42.705 22.2,42.902 v1(22.2,43.05) ; R52.2@20.395,15.275 20.525,15.405 20.525,16 21.719,17.194 21.719,17.863 C31.2@21.88,18.025 22.053,18.198 22.053,18.745 22.25,18.942 v1(22.25,19.09) ; v1(21.1,48.475) 21.657,47.918 21.657,47.458 C2.2@21.83,47.285 ; v1(21.15,24.515) 21.707,23.958 21.707,23.498 C20.2@21.88,23.325 ; v1(21.195,36.98) 21.206,36.98 21.659,36.526 21.659,35.956 C5.2@21.83,35.785 ; v1(21.245,13.02) 21.77,12.495 21.77,11.936 C23.2@21.88,11.825 ; v1(26.075,28.45) 29.845,28.45 C14.2@29.87,28.475 ; v1(26.125,4.49) 29.895,4.49 C32.2@29.92,4.515 ; R9.2@28.025,40.79 29.263,40.79 ; R19.2@28.075,16.83 R18.2@30.55,16.83 30.55,17.525 v1(29.5,18.575) ; v1(29.15,42.075) 29.15,40.903 29.263,40.79 ; R8.2@30.5,40.79 29.263,40.79 ; C17.2@31.48,47.45 31.53,47.5 v1(35.125,47.5) ; C35.2@31.53,23.49 31.58,23.54 v1(35.175,23.54) ; v1(31.954,18.397) 32.989,17.362 32.989,16.941 R17.2@33.1,16.83 ; v1(32.252,42.022) 32.951,41.322 32.951,40.889 R7.2@33.05,40.79 ; v1(38.875,32.65) 38.875,32.798 39.21,33.133 C8.2@39.21,34.035 ; v1(38.9,8.675) 38.9,8.823 39.26,9.183 C26.2@39.26,10.075 ; v1(38.925,44.5) 38.925,44.616 39.21,44.901 C7.2@39.21,45.635 39.3,45.725 39.3,46.25 40.579,47.529 40.579,48.209 R48.2@40.73,48.36 ; v1(38.975,20.54) 38.975,20.656 39.26,20.941 C25.2@39.26,21.675 39.371,21.786 39.371,22.346 40.607,23.582 40.607,24.227 R60.2@40.78,24.4 ; C12.2@39.21,28.56 39.383,28.387 39.383,27.965 v1(40.079,27.269) ; C9.2@39.21,40.01 39.383,39.837 39.383,39.467 v1(40.025,38.825) 40.78,38.07 R45.2@40.78,36.835 ; C30.2@39.26,4.6 39.433,4.427 39.433,4.005 v1(40.129,3.309) ; C27.2@39.26,16.05 39.433,15.877 39.433,15.507 v1(40.075,14.865) 40.83,14.11 R57.2@40.83,12.875 ; v1(44.575,32.975) 44.679,33.079 45.198,33.079 45.42,33.301 C4.2@45.42,34.035 45.593,34.208 45.593,34.843 46.825,36.075 46.825,36.63 R43.2@46.955,36.76 ; v1(44.75,9.075) 44.77,9.095 45.321,9.095 45.47,9.244 C22.2@45.47,10.075 ; v1(44.975,38.65) 44.975,38.798 45.356,39.179 45.356,39.946 C3.2@45.42,40.01 45.591,40.181 45.591,40.741 46.782,41.932 46.782,42.462 R46.2@46.955,42.635 ; v1(45.05,44.325) 45.05,44.434 45.42,44.804 C6.2@45.42,45.635 45.593,45.808 45.593,46.193 46.812,47.412 46.812,47.937 R47.2@46.985,48.11 ; v1(45.075,3.3) 45.075,3.374 45.47,3.769 C28.2@45.47,4.6 45.643,4.773 45.643,5.193 46.968,6.518 46.968,7.113 R54.2@47.055,7.2 ; v1(45.1,20.365) 45.1,20.474 45.47,20.844 C24.2@45.47,21.675 45.643,21.848 45.643,22.218 46.915,23.49 46.915,24.03 R59.2@47.035,24.15 ; v1(45.259,27.11) 45.34,27.19 45.34,28.48 C10.2@45.42,28.56 45.593,28.733 45.593,29.268 46.832,30.507 46.832,30.987 R42.2@47.005,31.16 ; R55.2@47.005,12.8 47.005,12.95 45.384,14.571 45.154,14.571 v1(45.05,14.675) 45.05,14.799 45.47,15.219 C21.2@45.47,16.05 45.625,16.205 45.625,16.8 46.832,18.007 46.832,18.502 R58.2@47.005,18.675 ; U48.14@58.515,4.79 60.29,4.79 60.67,5.17 C45.2@61.565,5.17 61.558,5.162 61.558,3.508 v1(61.55,3.5) ; U50.14@58.515,16.2 59.55,16.2 61.565,18.215 61.565,21.165 v1(61.725,21.325) ; U43.14@58.6,28.895 60.445,28.895 60.825,29.275 C40.2@61.65,29.275 v1(61.65,27.4) ; U45.14@58.6,40.305 60.423,40.305 61.65,41.532 61.65,44.265 62.371,44.986 62.371,45.446 v1(62.475,45.55) ; R32.2@63.125,12.59 63.135,12.6 v1(64.45,12.6) ; R27.2@63.21,36.695 63.23,36.675 v1(65,36.675)
Out_High: J5.2 U1.4 U2.4 | length 22.1
  Top Layer w0.254: U2.4@67.705,14.875 67.705,16.68 v1(68.325,17.3) ; J5.2@74.88,21.175 79.92,26.215 U1.4@79.92,30.3
  Signal w0.254: v1(68.325,17.3) 72.2,21.175 J5.2@74.88,21.175
Out_Low: J5.3 R3.1 R4.1 | length 10.3
  Top Layer w0.254: R3.1@68.12,19.4 68.135,19.415 68.135,21.235 v1(68.15,21.25)
  Bottom Layer w0.254: v1(68.15,21.25) 68.236,21.164 68.661,21.164 69.655,20.17 R4.1@69.655,19.425 73.63,19.425 J5.3@74.88,18.175
Red1: U2.1 U43.6 | length 43.5
  Top Layer w0.254: v1(55.775,26.275) 63.625,26.275 65.8,24.1 65.8,9.975 67.525,8.25 67.525,5.855 U2.1@67.705,5.675
  Bottom Layer w0.254: U43.6@52.85,35.245 51.97,35.245 50.875,34.15 50.875,29.339 53.939,26.275 v1(55.775,26.275)
Red2: U5.1 U48.6 | length 30.4
  Bottom Layer w0.254: U48.6@52.765,11.14 52.75,11.125 51.775,11.125 50.9,10.25 50.9,4.225 52.45,2.675 68.775,2.675 69.025,2.925 69.025,4 69.599,4.574 69.599,5.127 70.122,5.65 U5.1@70.22,5.65
Red_On1_Primary: U13.3 U42.1 U45.2 | length 35.3
  Top Layer w0.254: U13.3@27.75,44.95 28.75,44.95 32.9,49.1 50.3,49.1 v1(51.25,48.15) 51.398,48.15 51.623,47.925 U42.1@52.85,47.925
  Signal w0.254: v1(51.25,48.15) 51.337,48.062 51.337,41.738 v1(51.425,41.65)
  Bottom Layer w0.254: v1(51.425,41.65) 51.462,41.613 52.813,41.613 U45.2@52.85,41.575
Red_On1_Secondary: U31.3 U47.1 U50.2 | length 36.5
  Top Layer w0.254: U31.3@27.8,20.99 28.8,20.99 32.95,25.14 42.044,25.14 42.065,25.119 v1@51.306,25.119 ; v1(51.4,25.025) 51.4,24.35 51.93,23.82 U47.1@52.765,23.82
  Signal w0.254: v1(51.325,17.475) 51.362,17.512 51.362,24.987 v1(51.4,25.025)
  Bottom Layer w0.254: v1(51.325,17.475) 51.327,17.473 52.763,17.473 U50.2@52.765,17.47
Red_On2_Primary: U22.8 U42.4 U45.3 | length 37.2
  Top Layer w0.254: U22.8@27.7,36.095 30.484,36.095 33.368,38.979 34.729,38.979 v1(35.55,39.8) ; v1(50.575,45.25) 51.71,44.115 U42.4@52.85,44.115
  Signal w0.254: v1(35.55,39.8) 35.55,39.905 34.898,40.557 34.898,43.723 37.2,46.025 49.8,46.025 v1(50.575,45.25)
  Bottom Layer w0.254: v1(50.575,45.25) 50.575,44.125 51.855,42.845 U45.3@52.85,42.845
Red_On2_Secondary: U40.8 U47.4 U50.3 | length 36.6
  Top Layer w0.254: U40.8@27.75,12.135 30.534,12.135 33.417,15.019 34.778,15.019 v1(35.6,15.84) ; v1(50.625,21.29) 51.905,20.01 U47.4@52.765,20.01
  Signal w0.254: v1(35.6,15.84) 35.6,15.945 34.948,16.597 34.948,19.763 36.475,21.29 v1(50.625,21.29)
  Bottom Layer w0.254: v1(50.625,21.29) 50.625,19.885 51.77,18.74 U50.3@52.765,18.74
Red_On3_Primary: U22.3 U42.9 U45.4 | length 39
  Top Layer w0.254: U22.3@33.45,31.015 33.484,30.981 35.302,30.981 v1(35.336,30.948) ; v1(56.802,41.555) 56.822,41.575 U42.9@58.6,41.575
  GND w0.254: v1(35.336,30.948) 53.72,30.948 56.802,34.03 v1(56.802,41.555)
  Bottom Layer w0.254: U45.4@52.85,44.115 54.242,44.115 v1(56.802,41.555)
Red_On3_Secondary: U40.3 U47.9 U50.4 | length 39
  Top Layer w0.254: U40.3@33.5,7.055 33.533,7.022 35.352,7.022 v1(35.386,6.988) ; v1(56.8,17.45) 56.81,17.46 58.505,17.46 U47.9@58.515,17.47
  GND w0.254: v1(35.386,6.988) 53.78,6.988 56.99,10.198 56.99,17.112 56.8,17.302 v1(56.8,17.45)
  Bottom Layer w0.254: U50.4@52.765,20.01 54.24,20.01 v1(56.8,17.45)
Red_On_VD_Primary: U13.8 U42.12 U45.5 | length 29.8
  Top Layer w0.254: U13.8@33.5,39.87 34.427,39.87 34.513,39.956 35.568,41.011 35.568,41.493 v1(35.625,41.55) ; v1(54.95,45.4) 54.957,45.393 58.592,45.393 U42.12@58.6,45.385
  GND w0.254: v1(35.625,41.55) 49.2,41.55 53.05,45.4 v1(54.95,45.4)
  Bottom Layer w0.254: U45.5@52.85,45.385 52.857,45.393 54.943,45.393 v1(54.95,45.4)
Red_On_VD_Secondary: U31.8 U47.12 U50.5 | length 33.2
  Top Layer w0.254: U31.8@33.55,15.91 34.477,15.91 34.563,15.996 35.618,17.051 35.618,17.533 v1(35.675,17.59) ; v1(56.713,21.22) 56.743,21.25 58.485,21.25 U47.12@58.515,21.28
  GND w0.254: v1(35.675,17.59) 46.26,17.59 48.337,15.513 51.006,15.513 v1(56.713,21.22)
  Bottom Layer w0.254: U50.5@52.765,21.28 52.795,21.25 56.682,21.25 v1(56.713,21.22)
pads on no net: J1.A J2.A J3.A J4.A J5.A U44.3 U44.11 U45.6 U45.8 U49.3 U49.11 U50.6 U50.8

## Polygon pours and split planes (outlines as drawn)
GND on GND "GND" (solid, remove dead copper, pour order 6): 5,0 cw(c5,5) 0,5 0,48 cw(c5,48) 5,53 78,53 cw(c78,48) 83,48 83,5 cw(c78,5) 78,0
Out1 on Signal "+5V" (solid, remove dead copper, pour order 7): 5,0 cw(c5,5) 0,5 0,48 cw(c5,48) 5,53 78,53 cw(c78,48) 83,48 83,5 cw(c78,5) 78,0
GND on Bottom Layer "GND_L04_P009" (solid, remove dead copper, pour order 9): 5,0 cw(c5,5) 0,5 0,48 cw(c5,48) 5,53 78,53 cw(c78,48) 83,48 83,5 cw(c78,5) 78,0
GND on Top Layer "GND_L01_P008" (solid, remove dead copper, pour order 8): 5,0 cw(c5,5) 0,5 0,48 cw(c5,48) 5,53 78,53 cw(c78,48) 83,48 83,5 cw(c78,5) 78,0

## Silkscreen, mask and mechanical layers (free items; w line width, h text height)
Bottom Overlay:
  text "TSAL Relay Detect" at 64.791,15.85 h3 r270
Mechanical 1:
  the board outline again, w0.1